# Altium PCB ESP32 with USBC V1.1.PcbDoc (part 2 of 2)
Units mil, origin at the board's own origin, x right, y up, seen from the top; angles counter-clockwise.
Board outline 2725 x 1000 mil, 4 copper layers (L1, L2, L3, L4), stack 61.583 mil thick; 64 components, 73 nets, 299 pads, 160 vias.
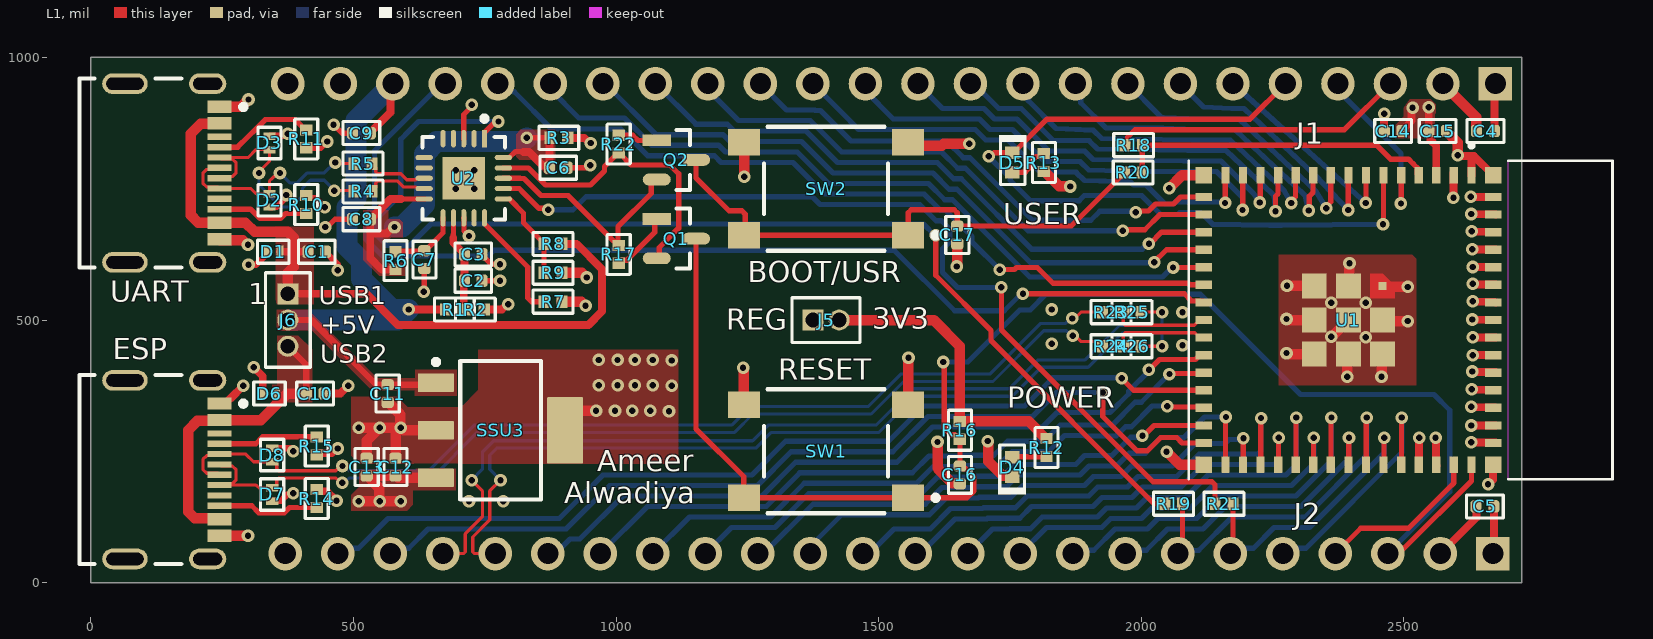
[diagram p0: L1 view]

## Via types
v1: diameter 24, hole 12, L1 to L4, tented top, 160 vias

## Nets (pads, with @x,y where several pads share a name; then routed paths per layer and width w, separated by ;. In a path a pad name is that pad's centre, name@x,y a point inside that pad or via, vN(x,y) a via of type N, cw(c..) or ccw(c..) an arc to the next point about the centre after c; other vN are vias at no path point) (continued)
CON2_USB_P: D7.2 ESP.A6 ESP.B6 R24.1 | length 1926.3
  L1 w6.03: ESP.A6 247.73,221.95 269.34,221.95 276.5,214.8 276.5,195.52 269.34,188.36 247.73,188.36 ESP.B6 314.53,185.47 320,180 344.41,180 D7.2 349.92,180.59 353.8,184.47 353.8,195.45 357.33,198.99 466.28,198.99 475.27,190 v1(478.8,190) ; v1(1870,470) 1874.86,470 1886.07,458.8 1918.36,458.8 1923.98,453.17 R24.1@1923.98,448
  L4 w6.03: v1(478.8,190) 482.41,190 491.32,198.9 648.8,198.9 735.79,285.89 1225.89,285.89 1260.97,320.97 1485.81,320.97 1547.8,382.95 1717.95,382.95 1814.49,479.49 1857.48,479.49 1866.97,470 v1(1870,470)
CON_ESP_USB_N: J2.21 R25.1 | length 1722.6
  L1 w6.03: J2.21 709.45,55 712.99,58.53 712.99,92.55 745.49,125.05 745.49,174.51 v1(725,195) ; R25.1 v1(2040,515)
  L4 w6.03: v1(725,195) 745.49,215.49 745.49,248.44 767.13,270.09 1260.25,270.09 1290.08,299.92 1495.08,299.92 1564.08,368.92 1749.08,368.92 1804.19,424.03 1893.46,424.03 1958.95,489.51 2036.47,489.51 2040,493.05 v1(2040,515)
CON_ESP_USB_P: J2.20 R26.1 | length 1699.3
  L1 w6.03: J2.20 730.55,55 727.01,58.53 727.01,86.73 759.51,119.23 759.51,174.51 v1(780,195) ; R26.1 v1(2040,450)
  L4 w6.03: v1(780,195) 759.51,215.49 759.51,242.63 772.94,256.06 1266.06,256.06 1295.89,285.89 1500.89,285.89 1569.9,354.9 1754.9,354.9 1810,410 1899.27,410 1964.76,475.49 2036.47,475.49 2040,471.95 v1(2040,450)
CON_GPIO0: J1.3 R18.1 | length 560.1
  L1 w10: R18.1 1974.61,838.63 1974.61,848.27 1988.94,862.59 2387.59,862.59 J1.3
DTR_FTDI: Q2.2 R17.2 U2.18 | length 430.3
  L1 w10: U2.18 816.94,770 817.26,769.68 824.56,769.68 857.24,737 908.83,737 1003.82,642.01 1003.82,677.83 1067.12,741.14 1067.12,761.81 1072.91,767.6 Q2.2
ESP_USB_N: R23.2 R25.2 U1.23 | length 175.6
  L1 w6.03: R23.2@1962.61,507.39 1964.97,507.39 1966.15,506.2 1966.15,493.53 1969.68,490 2101.54,490 2111.54,500 U1.23
ESP_USB_P: R24.2 R26.2 U1.24 | length 179.4
  L1 w6.03: R24.2@1962.61,452.61 1966.15,456.16 1966.15,472.06 1969.68,475.59 2102.48,475.59 2102.95,475.12 2111.54,466.54 U1.24
FTDI_USB_N: R4.2 U2.9 | length 118.6
  L1 w6.03: R4.2 542.22,752.22 542.22,760.95 545.75,764.48 584.13,764.48 595.47,753.14 619.05,753.14 621.88,750.32 U2.9
FTDI_USB_P: R5.2 U2.8 | length 118.6
  L1 w6.03: R5.2 542.23,790.78 542.23,782.05 545.76,778.51 589.95,778.51 601.29,767.17 619.05,767.17 621.88,770 U2.8
GND: C1.1 C2.1 C3.1 C4.1 C5.1 C6.1 C7.1 C8.1 C9.1 C10.1 C11.1 C12.1 C13.1 C14.1 C15.1 C16.1 C17.1 D1.1 D2.1 D3.1 D4.1 D6.1 D7.1 D8.1 ESP.A1B12 ESP.B1A12 ESP.S1 ESP.S2 ESP.S3 ESP.S4 J1.1 J1.23 J2.2 J2.24 R7.1 R9.1 R10.1 R11.1 R14.1 R15.1 SSU3.2 SSU3.4 SW1.3 SW1.4 SW2.3 SW2.4 U1.1 U1.2 U1.42 U1.43 U1.46 U1.47 U1.48 U1.49 U1.50 U1.51 U1.52 U1.53 U1.54 U1.55 U1.56 U1.57 U1.58 U1.59 U1.60 U1.61 U1.62 U1.63 U1.64 U1.65 U1.66 U1.67 U1.68 U1.69 U1.70 U1.71 U1.72 U1.73 U2.3 U2.13 U2.21 UART.A1B12 UART.B1A12 UART.S1 UART.S2 UART.S3 UART.S4 | length 4175.3
  L1 w10: C6.1 942.21,790 947.21,795 v1(951,795) ; U1.2@2595.39,779.88 U1.2@2596.02,780.5
  L1 w10.1: v1(446,677) 449.76,677 464.76,692 C8.1 ; v1(462,872) 478,856 C9.1 ; v1(634,554) 635,555 C7.1 ; U2.13 710.28,694.31 710.28,669.72 v1(720,660) ; U2.3 710,891.24 725,906.24 v1(725,910) ; C2.1 v1(779,575) v1@780,576 ; C3.1 745,624.13 763.13,606 v1(779,606)
  L1 w12: v1(300,605) 314.33,605 334.41,625.08 D1.1 ; D2.1 344.92,715 345.81,715.89 353.8,715.89 369.52,731.61 369.52,735.81 v1(371.81,738.1) ; D3.1 340.89,850.89 367.64,850.89 371.75,855 v1(375,855) ; D7.1 345.89,155.89 361.63,155.89 373.43,167.7 382.7,167.7 v1(385,169.99) ; D8.1 379.41,255.59 v1(385,250) ; R10.1 414.63,732.38 427.62,732.38 v1(445,715) ; R11.1 437.43,827.99 449.44,840 v1(450,840) ; C1.1 446.93,628.82 470,605.75 v1(470,595)
  L1 w15: ESP.A1B12 255.67,340.98 265.29,350.6 265.6,350.6 v1(290,375) ; v1(310,410) 327.2,392.8 D6.1 ; R14.1 433.13,173.88 449.26,173.88 v1(467.66,155.47) ; R15.1 433.13,246.12 458.21,246.12 467.45,255.36 v1(469.88,255.36) ; C10.1 475,360 v1(490,375) ; v1(2463,893) v1(2463,893) 2463.04,860.04 C14.1 ; U1.42@2529.61,222.41 v1@2529.61,275.61 ; v1(2561,276) 2561.95,275.05 2561.95,223.07 U1.43@2562.61,222.41 ; J2.2 2638.56,123.56 2638.56,144.52 C5.1 ; v1(2595,733) 2595.39,733.39 U1.2@2595.39,779.88 ; v1(2603,814) 2604.72,812.28 2633.9,812.28 ; v1(2628,735) 2628.37,734.63 2670.22,734.63 U1.60 ; v1(2629,267) 2629.63,266.37 2675.36,266.37 U1.46@2675.59,266.61 ; v1(2629,299) 2629.11,299.11 2674.88,299.11 U1.47@2674.98,299 ; v1(2629,335) 2630.16,333.84 2674.36,333.84 U1.48@2675.59,332.61 ; v1(2629,702) 2629.61,701.39 2674.8,701.39 U1.59@2675.59,700.61 ; U1.1 2629.25,807.63 2633.9,812.28 ; v1(2630,368) 2630.93,367.07 2675.13,367.07 U1.49@2675.59,366.61 ; v1(2630,669) 2630.84,668.16 2675.04,668.16 U1.58@2675.59,667.61 ; v1(2631,402) 2632.2,400.8 2675.39,400.8 U1.50@2675.59,400.61 ; v1(2631,501) 2631.5,500.5 2675.48,500.5 U1.53@2675.59,500.61 ; v1(2631,635) 2631.57,634.43 2674.77,634.43 U1.57@2675.59,633.61 ; v1(2632,433) v1(2632,433) 2674.95,433.04 U1.51@2674.98,433 ; v1(2632,467) 2632.23,466.77 2675.43,466.77 U1.52@2675.59,466.61 ; v1(2632,536) 2633.27,534.73 2674.46,534.73 U1.54@2675.59,533.61 ; v1(2632,569) 2633.04,567.96 2675.23,567.96 U1.55@2675.59,567.61 ; v1(2632,601) 2632.3,600.7 2675.5,600.7 U1.56@2675.59,600.61 ; v1(2661,187) 2661.8,187 2670.59,195.79 U1.65 ; U1.62 2633.9,812.28 ; C4.1 2672.93,947.93 J1.1
  L1 w20: ESP.B1A12 v1(299.02,89.02) v1@300,90 ; UART.B1A12 246.65,652.2 288.85,652.2 297.96,643.09 v1(299.04,643.09) ; UART.A1B12 285.98,905.98 v1(300,920) ; v1(510,295) v1(550,295) ; C13.1 525,270 v1(550,295) ; C11.1 566.18,343.07 589.23,320.02 589.23,295.77 v1(590,295) ; C12.1 580,283.92 590,293.92 v1(590,295) ; SSU3.2 596.08,290 591.08,295 v1(590,295) ; R7.1 934,535 v1(942,527) ; R9.1 935,590 v1(944,581) ; SSU3.4 903.03,302.55 927.48,327 v1(962,327) ; v1(1242,409) 1243.5,407.5 SW1.4 ; SW2.4 1244,838.09 v1(1244,773) ; SW1.3 1557,339.09 v1(1557,427.94) ; SW2.3 1563.31,831.77 1620.16,831.77 1624.39,836 v1(1672.96,836) ; v1(1612.37,267.8) 1612.37,218.2 1614.77,215.8 1614.77,214.74 1640.8,188.7 1654.37,188.7 C16.1 ; v1(1649,602) 1649.5,602.5 1649.5,644.5 C17.1 ; v1(1708.16,269.44) 1708.92,268.67 1708.92,230.91 1736.72,203.11 1753.19,203.11 D4.1 ; v1(2048.61,249) 2049.07,249 2073.66,224.41 U1.64 ; v1(2053.54,751.11) 2078.02,775.59 U1.63 ; v1(2277,437) 2278.08,437 2280.04,435.04 U1.73 ; v1(2277,502) v1(2277,502) 2278.08,502 2280.08,500 U1.72 ; v1@2289.96,564.96 U1.71 ; v1(2362,468) 2363,468 U1.61 ; v1(2393,392) U1.70@2393.04,444.04 ; U1.69@2396.96,555.96 v1(2397,608) ; U1.67@2455.96,498.04 v1(2508,498) ; U1.66@2455.96,563.04 v1(2508,563) ; v1(2458,392) U1.68@2458.04,444.04 ; C15.1 2581.93,858.82 2603,837.75 v1@2603,822 ; v1(550,295) v1(590,295)
  other v1: 720,155 785,155 2530,276 1101,326 998,327 1031,327 1065,327 1106,375 967,376 1003,376 1036,376 1070,376 1106,423 967,424 1003,424 1036,424 1070,424 2079,452 1830,455 2428,467 2079,515 1830,520 2362,533 2428,533 2278,565 695,750 730,750 695,785 730,785
GPIO0: R18.2 R20.2 U1.4 | length 608.7
  L1 w10: R20.2 2002.5,781.5 2002.5,832.5 R18.2 2448.22,833 2474.88,806.34 2509.48,806.34 2518.27,797.55 2525.98,789.84 2525.98,778.46 U1.4
GPIO1: J1.4 U1.5 | length 331.5
  L1 w10: v1(2495,722) 2495.39,722.39 U1.5
  L4 w10: J1.4 2375,937.15 2495,817.15 v1(2495,722)
GPIO2: D5.1 J1.5 U1.6 | length 1530.4
  L1 w10: v1(1709.66,811.66) 1713.45,811.66 1720.49,818.7 1756.97,818.7 1820.86,882.59 2207.59,882.59 J1.5 ; v1@2461.55,684.78 U1.6@2461.55,773.37
  L4 w10: v1(1709.66,811.66) 1750.8,770.52 1750.8,765.66 1789.27,727.2 1882.09,727.2 1891.89,737 2001.18,737 2037.4,700.79 2069.68,700.79 2073.9,705 2113.5,705 2133.01,685.49 2135.94,682.56 2244.88,680.36 2267.24,680.36 v1(2460.91,682.56)
GPIO3: J1.6 U1.7 | length 393.9
  L1 w10: v1@2428.39,723.39 U1.7@2428.39,776.59
  L4 w10: J1.6 v1(2428,723) v1@2427.41,723.59
GPIO4: J1.7 U1.8 | length 482.8
  L1 w10: v1(2394.36,709.56) 2394.68,709.88 2394.68,775.27 U1.8
  L4 w10: J1.7 2119.07,905.93 2172.49,903.07 ccw(c2175,950) 2175,903 2192.18,903 2196.14,903 2331.97,775.39 2332.18,775.18 2332.27,775.09 v1(2394.36,709.56)
GPIO5: J1.8 U1.9 | length 542.4
  L1 w10: v1(2352.87,712.87) 2352.87,716.66 2361.39,725.18 U1.9@2361.39,774.59
  L4 w10: J1.8 2036.3,888.7 2039.07,885.93 2042.98,885.78 2113.52,883.01 2113.72,883 2186.61,883 2318.42,759.37 2321.09,756.86 2332.39,745.56 v1(2352.87,712.87)
GPIO6: J1.9 U1.10 | length 635.7
  L1 w10: v1(2319.15,708.49) 2320.36,709.71 2320.36,735.49 2327.72,742.84 2327.72,773.31 U1.10@2328,773.59
  L4 w10: J1.9 1885.23,939.77 1885.23,913.77 1933.49,865.51 2041.37,865.51 2041.57,865.51 2105.24,863.01 2105.43,863 2178.32,863 2310.3,739.37 2312.43,737.24 v1(2319.15,708.49)
GPIO7: J1.10 U1.11 | length 673
  L1 w10: v1(2286.34,722.83) 2286.34,726.62 2294.39,734.68 U1.11@2294.39,774.59
  L4 w10: J1.10 1785.33,939.67 1785.33,917.67 1838.07,864.93 1909.52,861.2 1925.2,845.51 2097.27,843 2097.34,843 2170.04,843 2258.67,759.98 2273.02,745.63 v1(2286.34,722.83)
GPIO8: J1.11 U1.12 | length 761.6
  L1 w10: v1(2256.06,707.36) 2256.06,735.65 2260.75,740.34 2260.75,773.34 U1.12@2261,773.59
  L4 w10: J1.11 1682,950 1729,903 1771.72,903 1829.79,844.93 1832.72,842 1901.23,841.2 1916.92,825.51 2088.99,823 2089.06,823 2161.75,823 2250.38,739.98 2253.02,737.34 v1(2256.06,707.36)
GPIO9: J1.12 U1.13 | length 798.8
  L1 w10: v1(2226.26,723.74) 2226.97,724.44 2226.97,776.17 U1.13@2227.39,776.59
  L4 w10: J1.12 1622,903 1700.72,903 1720.72,883 1763.43,883 1821.5,824.93 1824.43,822 1892.95,821.2 1908.63,805.51 2080.78,803 2152.29,803 2213.36,741.93 v1(2226.26,723.74)
GPIO10: J1.13 U1.14 | length 905.2
  L1 w10: v1(2193.36,709.56) 2193.79,709.98 2193.79,775.38 U1.14@2194,775.59
  L4 w10: J1.13 1475,936 1528,883 1692.43,883 1712.43,863 1755.15,863 1813.22,804.93 1816.15,802 1884.67,801.2 1900.35,785.51 1991.97,783 2144.01,783 2193.36,733.65 v1(2193.36,709.56)
GPIO11: J1.14 U1.15 | length 934.4
  L1 w10: v1@2160.39,723.39 U1.15@2160.39,776.59
  L4 w10: J1.14 1429.32,895.68 1462,863 1684.15,863 1704.15,843 1746.86,843 1804.93,784.93 1807.86,782 1876.38,781.2 1892.07,765.51 1975.6,763.11 1979.57,763 1985.57,757 2009.47,757 2045.68,720.79 2061.4,720.79 2065.61,725 2158,725 v1(2160,723)
GPIO12: J1.15 U1.16 | length 972.1
  L1 w10: v1(1990,705) 1992.68,707.68 2014.39,707.68 2027.5,720.79 2061.79,720.79 2075.25,734.25 U1.16
  L4 w10: J1.15 1325,900 1378.28,900 1379.28,899 1389.57,899 1447.57,841 1629.53,841 1661.53,809 1674.14,809 1793.14,690 1904.32,690 1921.32,707 1988,707 v1(1990,705)
GPIO13: J1.16 U1.17 | length 1080.1
  L1 w10: v1(1965,670) 1967,672 2007,672 2035.79,700.79 U1.17
  L4 w10: J1.16 1175,938.14 1233.14,880 1370,880 1430,820 1620,820 1651,789 1665.85,789 1784.85,670 v1(1965,670)
GPIO14: J1.17 U1.18 | length 1188.3
  L1 w10: v1(2015,645) 2016.93,645 2039.25,667.32 U1.18
  L4 w10: J1.17 1152,873 1211.85,873 1224.85,860 1361.72,860 1421.72,800 1611.72,800 1642.72,769 1657.57,769 1791.57,635 2002.14,635 2012.14,645 v1(2015,645)
GPIO15: J1.18 U1.19 | length 1296.3
  L1 w10: v1(2025,610) 2025,610.56 2048.29,633.86 U1.19
  L4 w10: J1.18 979.47,950 1076.47,853 1203.57,853 1216.57,840 1353.43,840 1413.43,780 1603.43,780 1634.43,749 1649.28,749 1789.28,609 2024,609 v1(2025,610)
GPIO16: J1.19 U1.20 | length 1410.9
  L1 w10: v1(2061,600) 2061.2,600.2 2119.21,600.2 U1.20
  L4 w10: J1.19 875,939 929.11,884.89 1016.29,884.89 1068.18,833 1195.28,833 1208.28,820 1345.15,820 1405.15,760 1595.15,760 1626.15,729 1641,729 1788,582 2040.82,582 2058.82,600 v1(2061,600)
GPIO17: J1.20 U1.21 | length 1512.2
  L1 w10: v1(1730.98,595.98) 1758.96,595.98 1762.98,600 1802.38,600 1832.38,570 2090.47,570 2093.54,566.93 U1.21
  L4 w10: J1.20 789.61,950 804.85,934.77 806.23,934.77 877,864 1008.9,864 1059.9,813 1187,813 1200,800 1336.86,800 1396.86,740 1586.86,740 1617.86,709 1627.86,709 1678.08,658.78 1678.08,648.88 v1(1730.98,595.98)
GPIO18: J1.21 U1.22 | length 2045.4
  L1 w10: v1(1775,550) 2082.18,550 2095.85,536.34 2116.54,536.34 U1.22
  L4 w10: J1.21 667.57,950 540,822.43 540,716.78 523,699.78 523,654.22 555.22,622 756.82,622 767.82,633 1529.75,633 1645.07,517.68 1739.4,517.68 1771.72,550 v1(1775,550)
GPIO21: J2.19 U1.25 | length 1409.8
  L1 w10: v1(2015,405) 2035,425 2103.46,425 2112,433.54 U1.25@2118.94,433.54
  L4 w10: J2.19 884.61,55 912.61,83 931,83 1012.95,164.95 1277.82,164.95 1341.86,229 1535.38,229 1602.82,296.44 1812.44,296.44 1840,324 1941,324 1976.66,359.66 1976.66,364.48 2015,402.82 v1(2015,405)
GPIO26: J2.18 U1.26 | length 1292.2
  L1 w10: v1(2054,397) 2055.3,398.3 2118.11,398.3 U1.26
  L4 w10: J2.18 1059.95,144.95 1286.1,144.95 1350.15,209 1564.1,209 1595.91,240.8 1656.8,240.8 1658.44,242.44 1719.34,242.44 1745.9,269 1802.57,269 1803.57,270 1815.89,270 1846.01,300.12 1945.41,300.12 1988.77,343.49 2000.26,343.49 2053.77,397 v1(2054,397)
GPIO33: J2.17 U1.28 | length 1168.1
  L1 w10: v1(2050,336) 2051.66,334.34 2117.75,334.34 U1.28
  L4 w10: J2.17 1139.95,124.95 1294.39,124.95 1358.43,189 1572.38,189 1604.19,220.8 1665.09,220.8 1666.72,222.44 1727.62,222.44 1754.18,249 1823.18,249 1854.3,280.12 1891.23,280.12 1892.35,279 1952.57,279 1970.27,296.7 1981.76,296.7 2021.06,336 v1(2050,336)
GPIO34: J2.16 U1.29 | length 1050.6
  L1 w10: v1(2002.62,279.38) 2004.89,279.38 2024.73,299.21 U1.29
  L4 w10: J2.16 1219.95,104.95 1302.67,104.95 1366.72,169 1580.67,169 1612.47,200.8 1673.37,200.8 1675.01,202.44 1735.91,202.44 1758.47,225 1875.54,225 1892.54,242 1945,242 1979.7,276.7 1999.94,276.7 v1(2002.62,279.38)
GPIO35: J2.15 U1.31 | length 1088
  L1 w10: U1.31@2161,224.41 v1@2161,313
  L4 w10: J2.15 1281,55 1375,149 1588.95,149 1620.76,180.8 1681.66,180.8 1683.29,182.44 1744.19,182.44 1766.75,205 1883.83,205 1900.83,222 1953.28,222 1977.69,246.41 2007.83,246.41 2037.43,276 2081.86,276 2121.08,315.22 v1(2161.64,315.22)
GPIO36: J2.14 U1.32 | length 977.5
  L1 w10: U1.32@2194.61,221.41 v1@2194.61,274.61
  L4 w10: J2.14 1370,69 1430,129 1597.24,129 1629.04,160.8 1689.94,160.8 1691.58,162.44 1752.48,162.44 1775.04,185 1892.11,185 1909.11,202 1961.57,202 1981.57,222 2059.79,222 2102.79,265 2160.43,265 2168,272.57 2192.57,272.57 v1(2195,275)
GPIO37: J2.13 U1.33 | length 990.7
  L1 w10: U1.33@2228,222.41 v1@2228,311
  L4 w10: J2.13 1482.47,55 1529.47,102 1598.52,102 1637.33,140.8 1698.23,140.8 1699.86,142.44 1760.76,142.44 1783.32,165 1900.4,165 1917.4,182 1974.43,182 1994.43,202 2068.08,202 2111.08,245 2222.78,245 2228.64,250.86 v1(2228.64,313.22)
GPIO38: J2.12 U1.34 | length 861.9
  L1 w10: U1.34@2261.61,222.41 v1@2261.61,275.61
  L4 w10: J2.12 1580,55 1645.8,120.8 1706.61,120.8 1708.24,122.44 1769.04,122.44 1791.6,145 1908.68,145 1925.68,162 1982.72,162 2002.72,182 2076.36,182 2119.36,225 2254,225 2262,233 v1(2262,276)
GPIO39: J2.11 U1.35 | length 874.1
  L1 w10: U1.35@2295,223.41 v1@2295,312
  L4 w10: J2.11 1716.98,101.98 1750.52,101.98 1750.97,102.44 1789.16,102.44 1811.72,125 1916.96,125 1933.96,142 1991,142 2011,162 2084.65,162 2127.65,205 2276,205 2295.64,224.64 v1(2295.64,314.22)
GPIO40: J2.10 U1.36 | length 732.6
  L1 w10: U1.36@2328.61,222.41 v1@2328.61,275.61
  L4 w10: J2.10 1820,105 1925.25,105 1942.25,122 2001,122 2021,142 2094,142 2137,185 2286.72,185 2303.72,202 2304.21,202 2329,226.79 v1(2329,276)
GPIO41: J2.9 U1.37 | length 736.7
  L1 w10: U1.37@2362,223.41 v1@2362,312
  L4 w10: J2.9 1876.47,61.47 1910,61.47 1950.53,102 2012,102 2032,122 2106,122 2149,165 2295,165 2312,182 2312.5,182 2362.64,232.14 v1(2362.64,314.22)
GPIO42: J2.8 U1.38 | length 593.8
  L1 w10: U1.38@2395.61,222.41 v1@2395.61,275.61
  L4 w10: J2.8 1976.47,61.47 2010,61.47 2050.53,102 2118,102 2161,145 2304.43,145 2396,236.57 v1(2396,276)
GPIO45: J2.5 U1.41 | length 471.5
  L1 w10: U1.41@2496,223.41 v1@2496,312
  L4 w10: J2.5@2280.18,55 J2.5 2280.33,65.33 2313.86,65.33 2496.64,248.11 v1(2496.64,314.22)
GPIO46: J2.4 U1.44 | length 316.2
  L1 w10: J2.4 2418.41,103.41 2509.41,103.41 2585.2,179.2 2595.79,189.81 U1.44
GPIO47: J2.23 U1.27 | length 1800.9
  L1 w10: v1@1965.82,389 v1(1963,389) 1985.86,366.14 U1.27
  L4 w10: J2.23 480.33,65.33 509.33,65.33 566,122 892,122 974.95,204.95 1258.95,204.95 1323,269 1518.81,269 1586.25,336.44 1778.44,336.44 1832,390 1962,390 v1(1963,389)
GPIO48: J2.22 U1.30 | length 1764.8
  L1 w10: v1(1927,362) 1927,316.28 1992.28,251 2012.43,251 2037.43,276 2067.92,276 2078.17,265.75 U1.30
  L4 w10: J2.22 580.33,65.33 605.33,65.33 642,102 905,102 987.95,184.95 1269.53,184.95 1333.58,249 1527.09,249 1594.53,316.44 1793.44,316.44 1840,363 1854.21,363 1855.21,362 v1(1927,362)
NetC7_2: C7.2 R6.2 U2.11 | length 133.9
  L1 w10: R6.2 580.96,630.96 634.04,630.96 C7.2 636.18,631.93 649.25,645 670.4,666.15 670.4,694.36 U2.11
NetD4_2: D4.2 R12.1 | length 65.5
  L1 w10: D4.2 1755.65,239.35 1819.35,239.35 R12.1
NetD5_2: D5.2 R13.1 | length 80.4
  L1 w10: D5.2 1779.29,781.3 1788.13,790.14 1788.13,799.78 1799.73,811.38 1809.37,811.38 R13.1
NetJ1_A5: R11.2 UART.A5 | length 195.3
  L1 w10: UART.A5 279.3,829.21 300,849.91 313.19,863.1 332.09,882 388.83,882 408.82,862.01 R11.2
NetJ1_B5: R10.2 UART.B5 | length 176.7
  L1 w10: UART.B5 303.98,711.1 321.98,693.11 360.72,693.11 370.6,702.99 R10.2
NetJ2_A5: ESP.A5 R15.2 | length 190.8
  L1 w10: ESP.A5 313.71,264.21 326.98,277.48 429.53,277.48 R15.2
NetJ2_B5: ESP.B5 R14.2 | length 194.6
  L1 w10: ESP.B5 306.26,146.1 319.25,133.11 368.55,133.11 378.43,142.99 R14.2
NetQ1_1: Q1.1 R17.1 | length 120.1
  L1 w10: R17.1 1010.63,613.62 1020.27,613.62 1074,667.35 1074,688.82 Q1.1
NetQ2_1: Q2.1 R22.1 | length 76.9
  L1 w10: R22.1 1031.99,852.01 1042,842 1077.18,842 Q2.1
NetR7_2: R7.2 U2.15 | length 220.7
  L1 w10: U2.15 749.37,683.28 832,600.65 832,542 839,535 R7.2
RTS_FTDI: Q1.2 R22.2 U2.19 | length 572.1
  L1 w10: U2.19 833.03,789.68 845.79,776.93 865.72,757 951.18,757 978,783.82 978,792.17 1003.82,817.99 R22.2 1006.18,817.99 1028.75,795.42 1102.35,795.42 1119.29,778.48 1119.29,674.93 1082.37,638 1082.37,622.39 Q1.2
RXD_FTDI: R19.2 U2.1 | length 2240.4
  L1 w10: U2.1@749.6,856.94 767.65,875 767.98,875.32 773.32,875.32 v1(776,878) ; v1(1609.01,661.39) 1609.01,585.18 1714,480.18 1714,461 2025,150 R19.2
  L4 w10: v1(776,878) 623.86,878 605,859.14 590,844.14 590,738.5 543,691.5 543,662.5 563.5,642 606.5,642 609.5,645 647.5,683 845.79,683 1585.37,683 1606.98,661.39 v1(1609.01,661.39)
TXD_FTDI: R21.2 U2.17 | length 1761.3
  L1 w10: U2.17 815.65,750.32 824,741.96 845.79,720.17 853.28,712.68 868.32,712.68 v1(871,710) ; v1(1734,562.12) 1734,481 2023,192 2135.13,192 2140.98,186.14 R21.2
  L4 w10: v1(871,710) 918.25,710 943.25,735 1373.58,735 1388.58,720 1578.58,720 1609.58,689 1619.58,689 1636.01,672.57 1636.01,649.5 1622,635.5 1622,590.82 1650.7,562.12 v1(1734,562.12)
U0RXD: J2.6 R21.1 U1.40 | length 551.8
  L1 w10: J2.6 2175,60 R21.1 ; U1.40@2462.61,222.41 v1@2462.61,275.61
  L4 w10: J2.6 2180.33,65.33 2213.86,65.33 2253.53,105 2321,105 2463,247 v1(2463,276)
U0TXD: J2.7 R19.1 U1.39 | length 697
  L1 w10: J2.7 2079,64 2079,105 R19.1 ; U1.39@2429,223.41 v1@2429,312
  L4 w10: J2.7 2075.86,60.86 2110,60.86 2110,61.47 2173.53,125 2312.72,125 2429.64,241.92 v1(2429.64,314.22)
VBUS_SENSE: R8.1 R9.2 U2.16 | length 167.8
  L1 w10: U2.16@796.94,730.4 824,703.35 824,685.17 862.99,646.18 R9.2
pads on no net: ESP.A8 ESP.B8 J1.24 U2.2 U2.4 U2.5 U2.6 U2.7 U2.14 UART.A8 UART.B8

## Polygon pours and split planes (outlines as drawn)
GND on L1 "GND_L01_P012" (solid, pour order 12): 948,443 1119,443 1119,227 1118,226 511,226 496,241 496,354 583,354 603,334 705,334 738,367 738,443
GND on L1 "GND_L01_P010" (solid, pour order 10): 2524,624 2524,376 2262,376 2262,624
+5V_VBUS2 on L1 "+5V_VBUS2_L01_P009" (solid, pour order 9): 395,470 421,444 421,343 345,343 345,377 355,377 355,470
+5V_VBUS1 on L1 "+5V_VBUS1_L01_P008" (solid, pour order 8): 424,530 424,531 424,678 352,678 352,530 353,530
+5V on L1 "+5V_L01_P007" (solid, pour order 7): 354,480 421,480 535,366 617,366 617,356 697,356 697,405 618,405 618,390 617,389 545,389 412,522 354,522 354,506
+3V3_REG on L1 "+3V3_REG_L01_P005" (solid, pour order 5): 496,167 511,182 511,215 619,215 619,217 695,217 695,176 613,176 613,148 602,137 496,137 496,147
+3V3_FTDI on L1 "+3V3_FTDI_L01_P002" (solid, pour order 2): 519,709 566,709 566,692 588,692 594,686 594,658 572,658 565,651 555,651 555,612 558,609 599,609 599,584 593,584 549,584 519,614
+3V3_FTDI on L1 "+3V3_FTDI_L01_P001" (solid, pour order 1): 884,862 818,862 810,854 810,811 816,805 839,805 866,778 884,778
+3V3 on L1 "+3V3_L01_P000" (solid, pour order 0): 2499.87,888 2499.87,904 2512,920 2552,920 2561,911 2561,894 2559,892 2559,871 2561,869 2561,846 2485,846 2485,871.78
GND on L2 "GND_L02_P015" (solid, pour order 15): 20,17 2716,17 2715,18 2715,993 20,992
+3V3_REG on L2 "+3V3_REG_L02_P014" (solid, pour order 14): 494,131 651,131 651,192 581,192 566,177 494,177 494,162
+3V3 on L2 "+3V3_L02_P013" (solid, pour order 13): 2709,21 2709,987 927,987 927,782.73 1404,786 1404,475 1455,475 1456,476 1458,474 1549,474 1549,689 1550,690 1939,690 2037,788 2038,787 2525,787 2525,332 2577,280 2577,104 2635,46 2635,21 2708,21
GND on L3 (split plane): 2704.9,20.1 20.1,20.1 20.1,979.9 2704.9,979.9

## Silkscreen, mask and mechanical layers (free items; w line width, h text height)
Top Overlay:
  text "J1" at 2296,836 h40
  text "USER" at 1738,682 h40
  text "BOOT/USR" at 1251,572 h40
  text "USB1" at 434,530 h35
  text "3V3" at 1488,483 h40
  text "REG" at 1210,481 h40
  text "+5V" at 438,474 h35
  text "USB2" at 437,419 h35
  text "RESET" at 1309,386 h40
  text "POWER" at 1745,333 h40
  text "Ameer" at 964,212 h40
  text "Alwadiya" at 901,151.33 h40
  text "J2" at 2291,111 h40
Bottom Overlay:
  text "IO5" at 2004,879 h40 r90
  text "IO4" at 2099,879 h40 r90
  text "IO3" at 2199,879 h40 r90
  text "IO2" at 2294,879 h40 r90
  text "IO1" at 2399,879 h40 r90
  text "IO0" at 2494,879 h40 r90
  text "3V3" at 2599,879 h40 r90
  text "GND" at 2694,879 h40 r90
  text "GND" at 489,874 h40 r90
  text "5V" at 594,874 h40 r90
  text "IO18" at 694,874 h40 r90
  text "IO17" at 799,874 h40 r90
  text "IO16" at 899,874 h40 r90
  text "IO15" at 999,874 h40 r90
  text "IO14" at 1099,874 h40 r90
  text "IO13" at 1199,874 h40 r90
  text "IO12" at 1304,874 h40 r90
  text "IO11" at 1409,874 h40 r90
  text "IO10" at 1509,874 h40 r90
  text "IO9" at 1609,874 h40 r90
  text "IO8" at 1709,874 h40 r90
  text "IO7" at 1804,874 h40 r90
  text "IO6" at 1904,874 h40 r90
  text "NC" at 389,869 h40 r90
  text "DESIGNED BY AMEER ALWADIYA" at 2300,435 h60
  text "(C)2024 AMEER" at 1829,336 h40
  text "GND" at 394,274 h40 r90
  text "IO47" at 494,274 h40 r90
  text "IO48" at 594,274 h40 r90
  text "USB-" at 694,274 h40 r90
  text "USB+" at 799,274 h40 r90
  text "IO21" at 904,274 h40 r90
  text "IO26" at 999,274 h40 r90
  text "IO33" at 1099,274 h40 r90
  text "IO34" at 1204,274 h40 r90
  text "IO35" at 1299,274 h40 r90
  text "IO36" at 1399,274 h40 r90
  text "IO37" at 1504,274 h40 r90
  text "IO38" at 1599,274 h40 r90
  text "IO39" at 1699,274 h40 r90
  text "IO40" at 1799,274 h40 r90
  text "IO41" at 1894,274 h40 r90
  text "IO42" at 1989,274 h40 r90
  text "TXD" at 2094,274 h40 r90
  text "RXD" at 2194,274 h40 r90
  text "IO45" at 2294,274 h40 r90
  text "IO46" at 2394,274 h40 r90
  text "GND" at 2599,274 h40 r90
  text "3V3" at 2694,274 h40 r90
  text "EN" at 2494,264 h40 r90
Board Shape:
  lines w20: -2,-2 -2,997 2,1001 2722,1001 2723,1000 2723,-2 -2,-2

## Text inside footprints (layer, text, board x,y; h text height)
J1: Bottom Overlay "1" at 2655,1032 h40 r270
J2: Bottom Overlay "1" at 2640,-35 h40 r270
J6: Top Overlay "1" at 300,530 h40